# EAGLE board haccess (EAGLE 9.6.2)
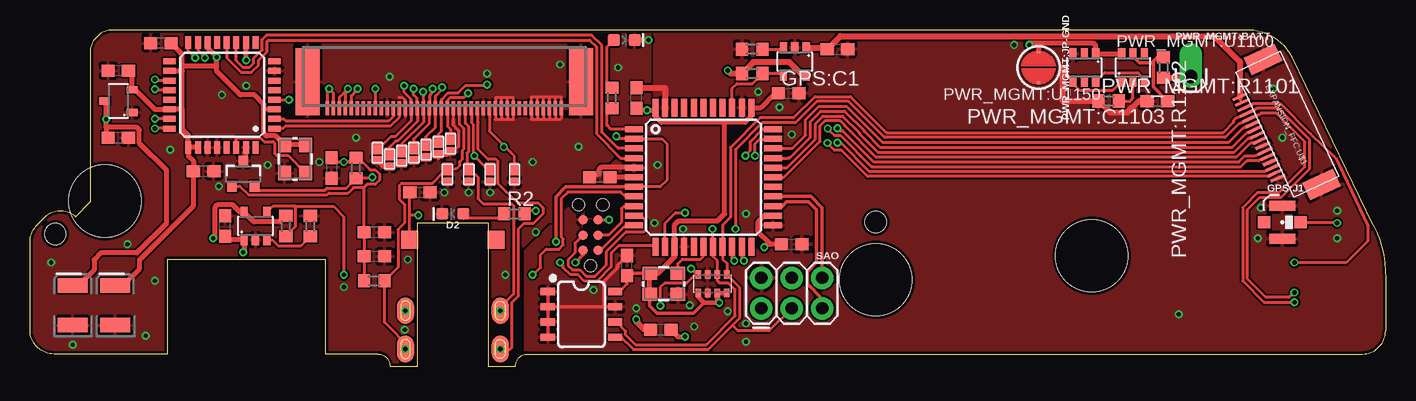
[diagram p0: board, top side]
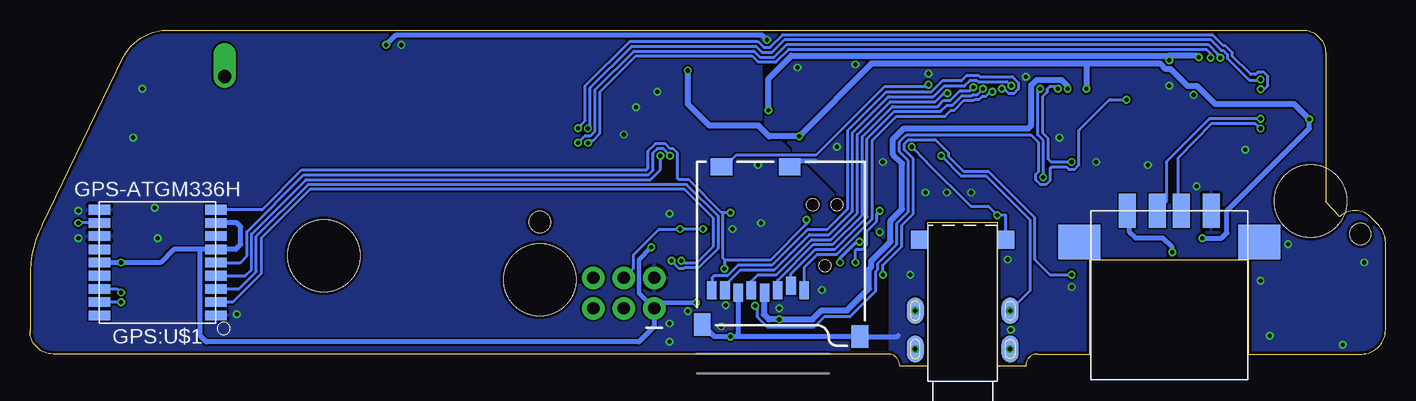
[diagram p1: board, bottom side, seen from below]

Size 113 x 28.02 mm. Coordinates in mm from the lower left corner, seen from the top.
Outline: 29,1.02 24.63,1.02 24.63,8.89 11.43,8.89 11.43,1.02 2,1.02 arc-90 0,3.02 0,10.31 arc-45 0.61,11.79 1.27,12.45 arc-90 3.81,12.45 5,13.72 5,26.1 arc-90 6.92,28.02 101.64,28.02 arc-60 105.23,25.76 111.98,11.76 arc-30 113,7.31 113,2.94 arc-90 111.08,1.02 41.48,1.02 arc90 40.48,0.02 38.19,0 38.19,11.94 32.29,11.94 32.29,0.02 30,0.02 arc90 29,1.02
Copper layers (1*16): Top 0.035mm / dielectric 1.5mm / Bottom 0.035mm
Design rules "dirtypcbs": minimum track width 6mil, minimum drill 12mil, track to track 6mil, track to pad 6mil, pad to pad 6mil, via to via 6mil, smd to smd 0mil, copper to edge 10mil, drill to drill 10mil, minimum pad ring 10mil, minimum via ring 6mil, stop-mask expansion 2mil, vias tented up to drill 25mil, thermal gap 10mil
Net classes: 1 pwr: width 0.305 mm
Holes 1.75 mm at 2.1,11.02 70.5,12.02
Holes 6 mm at 6.25,13.77 70.51,7.22 88.51,9.22
bKeepout: area -1,15.5 to 116,29

## Footprints (pad centres in the part's own frame; a part is rotated, then mirrored left to right if it is on the bottom)
LED-0603 = smd 1 x 1: A -0.877,0; C 0.877,0
C0603 = smd 1.1 x 1: 1 -0.85,0; 2 0.85,0
SO08 = smd 0.6 x 1.2: 1 -1.905,-2.8; 2 -0.635,-2.8; 3 0.635,-2.8; 4 1.905,-2.8; 5 1.905,2.8; 6 0.635,2.8; 7 -0.635,2.8; 8 -1.905,2.8
R0603 = smd 1 x 1.1: 1 -0.85,0; 2 0.85,0
FPC-C528044 = smd 0.25 x 1.3: P$1 -3.75,0.65; P$2 -3.25,0.65; P$3 -2.75,0.65; P$4 -2.25,0.65; P$5 -1.75,0.65; P$6 -1.25,0.65; P$7 -0.75,0.65; P$8 -0.25,0.65; P$9 0.25,0.65; P$10 0.75,0.65; P$11 1.25,0.65; P$12 1.75,0.65; P$13 2.25,0.65; P$14 2.75,0.65; P$15 3.25,0.65; P$16 3.75,0.65 | smd 1.6 x 2.8: SHIELD1 -5.75,-2.43; SHIELD2 5.75,-2.43
SOT23-5 = smd 0.6 x 0.9: 1 -0.95,-1.15; 2 0,-1.15; 3 0.95,-1.15; 4 0.95,1.15; 5 -0.95,1.15
U.FL = smd 2.2 x 0.85: 1 0,1.375; 2 0,-1.375 | smd 1.05 x 1: FEED 1.525,0; NC -1.525,0
ATGM336H = smd 1.8 x 0.8: P$1 -4.85,4.4; P$2 -4.85,3.3; P$3 -4.85,2.2; P$4 -4.85,1.1; P$5 -4.85,0; P$6 -4.85,-1.1; P$7 -4.85,-2.2; P$8 -4.85,-3.3; P$9 -4.85,-4.4; P$10 4.85,-4.4; P$11 4.85,-3.3; P$12 4.85,-2.2; P$13 4.85,-1.1; P$14 4.85,0; P$15 4.85,1.1; P$16 4.85,2.2; P$17 4.85,3.3; P$18 4.85,4.4
SOT23-3 = smd 0.8 x 0.9: 1 -0.95,-1; 2 0.95,-1; 3 0,1.1
DFN1608 = smd 0.65 x 0.8: P$1 0.625,0 | smd 1.05 x 0.8: P$2 -0.425,0
AUDIO_JACK_C128994 = smd 2.2 x 1.4 bottom: B1 -2.7,3.95; B2 -5.9,3.95; B4 -2.7,-3.95; B6 -5.9,-3.95 | smd 1.5 x 1.4 bottom: B3 -11.8,3.6; B5 -11.8,-3.6 | smd 2.2 x 1.4: T1 -2.7,3.95; T2 -5.9,3.95; T4 -2.7,-3.95; T6 -5.9,-3.95 | smd 1.5 x 1.4: T3 -11.8,3.6; T5 -11.8,-3.6
MICRO-SD-SOCKET-SDIO = smd 1.8 x 1.4: CD1 11.92,0.4; CD2 6.22,0.4 | smd 0.8 x 1.5: CD/DAT3 6.13,10.3; CLK 9.43,10.7; CMD 7.23,10.7; DAT0 11.63,10.7; DAT1 12.73,10.7; DAT2 5.03,10.7; GND 10.53,10.9; VCC 8.33,10.9 | smd 1.4 x 1.9: GND1 0.37,14.55; GND3 13.52,13.55
TC2030-IDC-NL = smd 0.787 x 0.787: 1 -1.27,-0.635; 2 -1.27,0.635; 3 0,-0.635; 4 0,0.635; 5 1.27,-0.635; 6 1.27,0.635 | hole 0.991: -2.54,0; 2.54,1.016; 2.54,-1.016
EXBV8V = smd 0.45 x 0.7: 1 -1.2,-0.775; 2 -0.4,-0.775; 3 0.4,-0.775; 4 1.2,-0.775; 5 1.2,0.775; 6 0.4,0.775; 7 -0.4,0.775; 8 -1.2,0.775
TQFP44 = smd 1.5 x 0.5: 1 -5.8,4; 2 -5.8,3.2; 3 -5.8,2.4; 4 -5.8,1.6; 5 -5.8,0.8; 6 -5.8,0; 7 -5.8,-0.8; 8 -5.8,-1.6; 9 -5.8,-2.4; 10 -5.8,-3.2; 11 -5.8,-4; 23 5.8,-4; 24 5.8,-3.2; 25 5.8,-2.4; 26 5.8,-1.6; 27 5.8,-0.8; 28 5.8,0; 29 5.8,0.8; 30 5.8,1.6; 31 5.8,2.4; 32 5.8,3.2; 33 5.8,4 | smd 0.5 x 1.5: 12 -4,-5.8; 13 -3.2,-5.8; 14 -2.4,-5.8; 15 -1.6,-5.8; 16 -0.8,-5.8; 17 0,-5.8; 18 0.8,-5.8; 19 1.6,-5.8; 20 2.4,-5.8; 21 3.2,-5.8; 22 4,-5.8; 34 4,5.8; 35 3.2,5.8; 36 2.4,5.8; 37 1.6,5.8; 38 0.8,5.8; 39 0,5.8; 40 -0.8,5.8; 41 -1.6,5.8; 42 -2.4,5.8; 43 -3.2,5.8; 44 -4,5.8
CRYSTAL-SMD-3.2X2.5MM = smd 1.2 x 1.1: 1 -1.175,-0.875; 2 1.175,-0.875; 3 1.175,0.875; 4 -1.175,0.875
FPC05040-17204 = smd 0.3 x 1.2: P$1 -9.75,0.6; P$2 -9.25,0.6; P$3 -8.75,0.6; P$4 -8.25,0.6; P$5 -7.75,0.6; P$6 -7.25,0.6; P$7 -6.75,0.6; P$8 -6.25,0.6; P$9 -5.75,0.6; P$10 -5.25,0.6; P$11 -4.75,0.6; P$12 -4.25,0.6; P$13 -3.75,0.6; P$14 -3.25,0.6; P$15 -2.75,0.6; P$16 -2.25,0.6; P$17 -1.75,0.6; P$18 -1.25,0.6; P$19 -0.75,0.6; P$20 -0.25,0.6; P$21 0.25,0.6; P$22 0.75,0.6; P$23 1.25,0.6; P$24 1.75,0.6; P$25 2.25,0.6; P$26 2.75,0.6; P$27 3.25,0.6; P$28 3.75,0.6; P$29 4.25,0.6; P$30 4.75,0.6; P$31 5.25,0.6; P$32 5.75,0.6; P$33 6.25,0.6; P$34 6.75,0.6; P$35 7.25,0.6; P$36 7.75,0.6; P$37 8.25,0.6; P$38 8.75,0.6; P$39 9.25,0.6; P$40 9.75,0.6 | smd 2 x 5.6: P$41 -11.4,-1.6; P$42 11.4,-1.6
1X01_OFFSET = drill 1.118 pad 1.88 offset: 1 0,0
EIA3528 = smd 1.2 x 2.5: A 1.65,0; C -1.65,0
SMT-JUMPER_2_NO_SILK_ROUND = smd 0.152 x 0.305: 1 -1.27,0; 2 1.27,0
SOT23-6 = smd 0.6 x 0.9: 1 -0.95,-1.15; 2 0,-1.15; 3 0.95,-1.15; 4 0.95,1.15; 5 0,1.15; 6 -0.95,1.15
SOT23-3' = smd 0.6 x 0.9: 1 -0.95,-1.15; 2 0.95,-1.15; 3 0,1.15
2X3 = drill 1.016 pad 1.88: 1 0,0; 2 0,2.54; 3 2.54,0; 4 2.54,2.54; 5 5.08,0; 6 5.08,2.54
USB_SOCKET_A_C42620 = smd 1.4 x 2.8: D+ -1,0; D- 1,0; GND -3.5,0; VCC 3.5,0 | smd 3.5 x 2.9: SHEILD1 -7.5,2.6; SHEILD2 7.5,2.6
VF_S-PQFP-G32 = smd 1.05 x 0.5: 1 -4.375,2.8; 2 -4.375,2; 3 -4.375,1.2; 4 -4.375,0.4; 5 -4.375,-0.4; 6 -4.375,-1.2; 7 -4.375,-2; 8 -4.375,-2.8; 17 4.375,-2.8; 18 4.375,-2; 19 4.375,-1.2; 20 4.375,-0.4; 21 4.375,0.4; 22 4.375,1.2; 23 4.375,2; 24 4.375,2.8 | smd 0.5 x 1.05: 9 -2.8,-4.375; 10 -2,-4.375; 11 -1.2,-4.375; 12 -0.4,-4.375; 13 0.4,-4.375; 14 1.2,-4.375; 15 2,-4.375; 16 2.8,-4.375; 25 2.8,4.375; 26 2,4.375; 27 1.2,4.375; 28 0.4,4.375; 29 -0.4,4.375; 30 -1.2,4.375; 31 -2,4.375; 32 -2.8,4.375

## Placement (x,y rotation side)
D1  [LED-0603]  49.53,27.18 0 top
D2  [LED-0603]  35.25,12.7 180 top
EEPROM:C1  0.1uF  [C0603]  49.78,8.38 90 top
EEPROM:EEPROM  24LC256  [SO08]  45.97,4.32 270 top
EXPANSION_FFC:C1  0.1uF  [C0603]  67.31,26.42 0 top
EXPANSION_FFC:R1  10k  [R0603]  60.2,26.42 180 top
EXPANSION_FFC:R2  10k  [R0603]  60.2,24.38 0 top
EXPANSION_FFC:U$1  PINEBOOK-PRO-EXPANSION-CONNECTOR  [FPC-C528044]  103.03,19.33 115 top
EXPANSION_FFC:U$2  CURRENT-LIMITINGSY6280  [SOT23-5]  63.75,25.4 180 top
GPS:C1  0.1uF  [C0603]  63.25,22.73 0 top
GPS:J1  U.FL  [U.FL]  104.39,11.99 0 top
GPS:U$1  GPS-ATGM336H  [ATGM336H]  102.36,8.64 180 bottom
HALL_EFFECT:C1  0.1uF  [C0603]  25.15,16.51 270 top
HALL_EFFECT:R1  10k  [R0603]  27.18,16.51 90 top
HALL_EFFECT:U$1  HALL_EFFECT_SENSORTH9245  [SOT23-3]  17.78,16 0 top
HEADPHONE:C1  0.1uF  [C0603]  32.51,14.48 0 top
HEADPHONE:C2  1uF  [C0603]  28.7,9.14 0 top
HEADPHONE:C3  0.1uF  [C0603]  28.7,11.18 0 top
HEADPHONE:ESD1  DIODE_ESDUAD03C05L01  [DFN1608]  40.39,16 270 top
HEADPHONE:ESD2  DIODE_ESDUAD03C05L01  [DFN1608]  38.35,16 270 top
HEADPHONE:ESD3  DIODE_ESDUAD03C05L01  [DFN1608]  36.58,16 270 top
HEADPHONE:ESD4  DIODE_ESDUAD03C05L01  [DFN1608]  34.8,16 270 top
HEADPHONE:HEADPHONES  C128994  [AUDIO_JACK_C128994]  35.25,-1.27 270 bottom
HEADPHONE:R1  12.2k  [R0603]  28.7,7.11 180 top
MICROSD:C1  0.1uF  [C0603]  52.58,3.05 0 top
MICROSD:ESD1  DIODE_ESDUAD03C05L01  [DFN1608]  34.04,18.29 270 top
MICROSD:ESD2  DIODE_ESDUAD03C05L01  [DFN1608]  29.97,17.27 270 top
MICROSD:ESD3  DIODE_ESDUAD03C05L01  [DFN1608]  28.96,17.78 270 top
MICROSD:ESD4  DIODE_ESDUAD03C05L01  [DFN1608]  35.05,18.54 270 top
MICROSD:ESD5  DIODE_ESDUAD03C05L01  [DFN1608]  33.02,18.03 270 top
MICROSD:ESD6  DIODE_ESDUAD03C05L01  [DFN1608]  32,17.78 270 top
MICROSD:ESD7  DIODE_ESDUAD03C05L01  [DFN1608]  30.99,17.53 270 top
MICROSD:JP1  USD-SDIO-SOCKET  [MICRO-SD-SOCKET-SDIO]  43.43,17.02 180 bottom
MPU:C3  1uF  [C0603]  47.5,15.75 180 top
MPU:C4  0.1uF  [C0603]  50.55,22.35 90 top
MPU:C6  0.1uF  [C0603]  63.5,10.16 0 top
MPU:PROGRAM  AVR_PROGRAMMER  [TC2030-IDC-NL]  46.74,10.92 90 top
MPU:RN2  10k  [EXBV8V]  56.9,6.86 180 top
MPU:U2  32U4  [TQFP44]  56.13,15.75 0 top
MPU:U$2  OSCILLATOR16MHZ_SHENZEN_SCTF_C87369  [CRYSTAL-SMD-3.2X2.5MM]  52.83,6.86 0 top
PBP_FFC:J2  [FPC05040-17204]  34.54,22.1 180 top
PWR_MGMT:BATT  [1X01_OFFSET]  96.77,24.13 0 top
PWR_MGMT:C1  0.1uF  [C0603]  7.37,19.05 0 top
PWR_MGMT:C8  0.1uF  [C0603]  7.37,24.64 180 top
PWR_MGMT:C10  47uF  [EIA3528]  3.56,5.08 90 top
PWR_MGMT:C11  47uF  [EIA3528]  7.11,5.08 90 top
PWR_MGMT:C1103  0.1uF  [C0603]  93.98,22.1 180 top
PWR_MGMT:JP-GND  JUMPER-SMT_2_NO_SILK_ROUND  [SMT-JUMPER_2_NO_SILK_ROUND]  84.07,24.89 270 top
PWR_MGMT:R1101  1k  [R0603]  89.92,22.1 0 top
PWR_MGMT:R1102  100  [R0603]  94.49,24.89 270 top
PWR_MGMT:U1100  FS312F-G  [SOT23-6]  91.95,24.89 0 top
PWR_MGMT:U1150  FS8205  [SOT23-6]  87.88,24.89 180 top
PWR_MGMT:U$3  REGULATOR  [SOT23-3']  7.37,22.1 90 top
R1  160  [R0603]  48.51,22.35 270 top
R2  160  [R0603]  40.39,12.7 0 top
SAO  FEMALE 2x3  [2X3]  60.96,4.83 0 top
USB_A:C1  0.1uF  [C0603]  16.26,11.68 90 top
USB_A:R1  10k  [R0603]  23.37,11.68 90 top
USB_A:R2  10k  [R0603]  21.34,11.68 270 top
USB_A:U$1  CURRENT-LIMITINGSY6280  [SOT23-5]  18.8,11.68 0 top
USB_A:USB  USB_RECESSED_C42620  [USB_SOCKET_A_C42620]  18.03,12.95 180 bottom
USB_HUB:C1  0.1uF  [C0603]  14.48,16.26 0 top
USB_HUB:C2  0.1uF  [C0603]  10.92,26.92 180 top
USB_HUB:IC1  TUSB2046BVFR  [VF_S-PQFP-G32]  16,22.61 180 top
USB_HUB:U$1  OSCILLATOR6MHZ_SHENZEN_SCTF_C387198  [CRYSTAL-SMD-3.2X2.5MM]  22.1,17.27 270 top

## Library data of the parts
D1 D2 = SparkFun-LED
EEPROM:C1 EXPANSION_FFC:C1 GPS:C1 HALL_EFFECT:C1 HEADPHONE:C1-HEADPHONE:C3 MICROSD:C1 MPU:C3 MPU:C4 MPU:C6 PWR_MGMT:C1 PWR_MGMT:C8 PWR_MGMT:C1103 USB_A:C1 USB_HUB:C1 USB_HUB:C2 = rcl; SPICEPREFIX: C
EEPROM:EEPROM = SparkFun-IC-Memory; PROD_ID: IC-09714
EXPANSION_FFC:R1 EXPANSION_FFC:R2 HALL_EFFECT:R1 HEADPHONE:R1 PWR_MGMT:R1101 PWR_MGMT:R1102 R1 R2 USB_A:R1 USB_A:R2 = rcl; SPICEPREFIX: R
EXPANSION_FFC:U$1 EXPANSION_FFC:U$2 GPS:U$1 HALL_EFFECT:U$1 HEADPHONE:ESD1-HEADPHONE:ESD4 HEADPHONE:HEADPHONES MICROSD:ESD1-MICROSD:ESD7 PBP_FFC:J2 USB_A:U$1 USB_A:USB = pinebook_parts
GPS:J1 = SparkFun-Connectors; PROD_ID: CONN-09193; SF_ID: WRL-09144
MICROSD:JP1 = SparkFun-Retired; PROD_ID: CONN-07820
MPU:PROGRAM MPU:RN2 MPU:U$2 PWR_MGMT:U$3 USB_HUB:U$1 = gone
MPU:U2 = SparkFun-IC-Microcontroller; PROD_ID: IC-11161
PWR_MGMT:BATT = SparkFun-Connectors
PWR_MGMT:C10 PWR_MGMT:C11 = SparkFun-Capacitors; PROD_ID: CAP-08310
PWR_MGMT:JP-GND = SparkFun-Jumpers
PWR_MGMT:U1100 PWR_MGMT:U1150 = geusebio
SAO = SparkFun-Connectors; PROD_ID: CONN-11566
USB_HUB:IC1 = texas; MF: TEXAS INSTRUMENTS; MPN: TUSB2046BVFR; OC_FARNELL: 1470507; OC_NEWARK: 77C1806

## Nets
1V8_CODEC: PBP_FFC:J2.P$35
3.3V: EEPROM:C1.1 EEPROM:EEPROM.8 EXPANSION_FFC:U$1.P$14 GPS:C1.1 GPS:U$1.P$6 GPS:U$1.P$8 GPS:U$1.P$14 MPU:C4.1 MPU:C6.1 MPU:RN2.5 MPU:RN2.7 MPU:RN2.8 MPU:U2.14 MPU:U2.24 MPU:U2.34 MPU:U2.44 MPU:U$2.1 MPU:U$2.4 PWR_MGMT:C8.1 PWR_MGMT:C11.A PWR_MGMT:U$3.2 SAO.1 USB_HUB:C1.1 USB_HUB:C2.1 USB_HUB:IC1.3 USB_HUB:IC1.10 USB_HUB:IC1.14 USB_HUB:IC1.18 USB_HUB:IC1.22 USB_HUB:IC1.25 USB_HUB:IC1.26 USB_HUB:U$1.1 USB_HUB:U$1.4
3V0_CODEC: HALL_EFFECT:C1.1 HALL_EFFECT:R1.2 HALL_EFFECT:U$1.1 HEADPHONE:C2.1 HEADPHONE:C3.1 HEADPHONE:R1.2 PBP_FFC:J2.P$36
3V0_SD: MICROSD:C1.1 MICROSD:JP1.VCC PBP_FFC:J2.P$37 PBP_FFC:J2.P$38
5V: EXPANSION_FFC:R2.1 EXPANSION_FFC:U$2.5 MPU:PROGRAM.2 MPU:U2.2 MPU:U2.7 PBP_FFC:J2.P$39 PBP_FFC:J2.P$40 PWR_MGMT:C1.1 PWR_MGMT:C10.A PWR_MGMT:U$3.3 USB_A:R2.1 USB_A:U$1.5
/RST: GPS:U$1.P$9 MPU:PROGRAM.5 MPU:RN2.4 MPU:U2.13 USB_HUB:IC1.4
AUD_STATUS: MPU:U2.12 R2.2
DM0: PBP_FFC:J2.P$29 USB_HUB:IC1.2
DM1: MPU:U2.3 USB_HUB:IC1.11
DM2: EXPANSION_FFC:U$1.P$2 USB_HUB:IC1.15
DM3: EXPANSION_FFC:U$1.P$5 USB_HUB:IC1.19
DM4: USB_A:USB.D- USB_HUB:IC1.23
DP0: PBP_FFC:J2.P$28 USB_HUB:IC1.1
DP1: MPU:U2.4 USB_HUB:IC1.12
DP2: EXPANSION_FFC:U$1.P$3 USB_HUB:IC1.16
DP3: EXPANSION_FFC:U$1.P$6 USB_HUB:IC1.20
DP4: USB_A:USB.D+ USB_HUB:IC1.24
EXP_EN: EXPANSION_FFC:R2.2 EXPANSION_FFC:U$2.4 MPU:U2.36
EXPANSION_FFC:ISET: EXPANSION_FFC:R1.1 EXPANSION_FFC:U$2.3
EXPANSION_FFC:VOUT: EXPANSION_FFC:C1.1 EXPANSION_FFC:U$1.P$15 EXPANSION_FFC:U$1.P$16 EXPANSION_FFC:U$2.1
G0: EXPANSION_FFC:U$1.P$11 MPU:U2.31
G1: EXPANSION_FFC:U$1.P$10 MPU:U2.30
G2: EXPANSION_FFC:U$1.P$9 MPU:U2.29
G3: EXPANSION_FFC:U$1.P$8 MPU:U2.28
GND: D1.C D2.C HALL_EFFECT:C1.2 HALL_EFFECT:U$1.3 HEADPHONE:C1.2 HEADPHONE:C2.2 HEADPHONE:C3.2 HEADPHONE:ESD1.P$1 HEADPHONE:ESD2.P$1 HEADPHONE:ESD3.P$1 HEADPHONE:ESD4.P$1 MICROSD:C1.2 MICROSD:ESD1.P$1 MICROSD:ESD2.P$1 MICROSD:ESD3.P$1 MICROSD:ESD4.P$1 MICROSD:ESD5.P$1 MICROSD:ESD6.P$1 MICROSD:ESD7.P$1 MICROSD:JP1.CD2 MICROSD:JP1.GND MICROSD:JP1.GND1 MICROSD:JP1.GND3 PBP_FFC:J2.P$1 PBP_FFC:J2.P$2 PBP_FFC:J2.P$3 PBP_FFC:J2.P$4 PBP_FFC:J2.P$5 PBP_FFC:J2.P$6 PBP_FFC:J2.P$9 PBP_FFC:J2.P$10 PBP_FFC:J2.P$11 PBP_FFC:J2.P$12 PBP_FFC:J2.P$14 PBP_FFC:J2.P$19 PBP_FFC:J2.P$27 PBP_FFC:J2.P$30 PBP_FFC:J2.P$41 PBP_FFC:J2.P$42 PWR_MGMT:C1.2 PWR_MGMT:C8.2 PWR_MGMT:C10.C PWR_MGMT:C11.C PWR_MGMT:JP-GND.1 PWR_MGMT:U1100.6 PWR_MGMT:U1150.1 PWR_MGMT:U$3.1 USB_A:C1.2 USB_A:R1.2 USB_A:U$1.2 USB_A:USB.GND USB_HUB:C1.2 USB_HUB:C2.2 USB_HUB:IC1.7 USB_HUB:IC1.27 USB_HUB:IC1.28 USB_HUB:IC1.31 USB_HUB:U$1.2
GND_ISOLATED: EEPROM:C1.2 EEPROM:EEPROM.1 EEPROM:EEPROM.2 EEPROM:EEPROM.3 EEPROM:EEPROM.4 EEPROM:EEPROM.7 EXPANSION_FFC:C1.2 EXPANSION_FFC:R1.2 EXPANSION_FFC:U$1.P$1 EXPANSION_FFC:U$1.P$4 EXPANSION_FFC:U$1.P$7 EXPANSION_FFC:U$1.SHIELD1 EXPANSION_FFC:U$1.SHIELD2 EXPANSION_FFC:U$2.2 GPS:C1.2 GPS:J1.1 GPS:J1.2 GPS:U$1.P$1 GPS:U$1.P$10 GPS:U$1.P$12 MPU:C3.2 MPU:C4.2 MPU:C6.2 MPU:PROGRAM.6 MPU:RN2.3 MPU:RN2.6 MPU:U2.5 MPU:U2.15 MPU:U2.23 MPU:U2.35 MPU:U2.43 MPU:U$2.2 PWR_MGMT:C1103.2 PWR_MGMT:JP-GND.2 PWR_MGMT:R1101.1 PWR_MGMT:U1150.3 SAO.2
GPS:RF_IN: GPS:J1.FEED GPS:U$1.P$11
GPS_ENABLE: GPS:U$1.P$5 MPU:U2.33
HALL_SENSE: HALL_EFFECT:R1.1 HALL_EFFECT:U$1.2 PBP_FFC:J2.P$32
HP_DET_H: HEADPHONE:C1.1 HEADPHONE:ESD1.P$2 HEADPHONE:HEADPHONES.B3 HEADPHONE:HEADPHONES.T3 PBP_FFC:J2.P$13
HP_GND: HEADPHONE:HEADPHONES.B4 HEADPHONE:HEADPHONES.T4 PBP_FFC:J2.P$15
HPO_L: HEADPHONE:ESD2.P$2 HEADPHONE:HEADPHONES.B2 HEADPHONE:HEADPHONES.T2 PBP_FFC:J2.P$16
HPO_R: HEADPHONE:ESD3.P$2 HEADPHONE:HEADPHONES.B6 HEADPHONE:HEADPHONES.T6 PBP_FFC:J2.P$17
MIC_IN2P: HEADPHONE:ESD4.P$2 HEADPHONE:HEADPHONES.B1 HEADPHONE:HEADPHONES.T1 HEADPHONE:R1.1 PBP_FFC:J2.P$18
MPU:32U4_OSC: MPU:U2.17 MPU:U$2.3
MPU:PB1/SCK: MPU:PROGRAM.3 MPU:U2.9
MPU:PB2/MOSI: MPU:PROGRAM.4 MPU:U2.10
MPU:PB3/MISO: MPU:PROGRAM.1 MPU:U2.11
MPU:PD5: MPU:U2.22
MPU:PD7: MPU:U2.27
MPU:PF0: MPU:U2.41
MPU:PF1: MPU:U2.40
MPU:PF4: MPU:U2.39
MPU:PF5: MPU:U2.38
MPU:PF6: MPU:U2.37
MPU:UCAP: MPU:C3.1 MPU:U2.6
MPU_RX: GPS:U$1.P$2 MPU:U2.20
MPU_TX: GPS:U$1.P$3 MPU:U2.21
N$1: D1.A R1.1
N$2: D2.A R2.1
PBP_FFC:PMIC_PWRON: PBP_FFC:J2.P$31
PULSE: GPS:U$1.P$4 MPU:U2.32
PWR_MGMT:FS_CS: PWR_MGMT:R1101.2 PWR_MGMT:U1100.2
PWR_MGMT:FS_V_BATT: PWR_MGMT:C1103.1 PWR_MGMT:R1102.1 PWR_MGMT:U1100.5
PWR_MGMT:OC: PWR_MGMT:U1100.3 PWR_MGMT:U1150.6
PWR_MGMT:OD: PWR_MGMT:U1100.1 PWR_MGMT:U1150.4
SAO1: MPU:U2.25 SAO.5
SAO2: MPU:U2.26 SAO.6
SCL: EEPROM:EEPROM.6 EXPANSION_FFC:U$1.P$12 GPS:U$1.P$17 MPU:RN2.2 MPU:U2.18 SAO.4
SD_CLK: MICROSD:ESD4.P$2 MICROSD:JP1.CLK PBP_FFC:J2.P$20
SD_CMD: MICROSD:ESD5.P$2 MICROSD:JP1.CMD PBP_FFC:J2.P$22
SD_D0: MICROSD:ESD3.P$2 MICROSD:JP1.DAT0 PBP_FFC:J2.P$26
SD_D1: MICROSD:ESD2.P$2 MICROSD:JP1.DAT1 PBP_FFC:J2.P$25
SD_D2: MICROSD:ESD7.P$2 MICROSD:JP1.DAT2 PBP_FFC:J2.P$24
SD_D3: MICROSD:ESD6.P$2 MICROSD:JP1.CD/DAT3 PBP_FFC:J2.P$23
SD_DET_L: MICROSD:ESD1.P$2 MICROSD:JP1.CD1 PBP_FFC:J2.P$21
SDA: EEPROM:EEPROM.5 EXPANSION_FFC:U$1.P$13 GPS:U$1.P$16 MPU:RN2.1 MPU:U2.19 SAO.3
STATUS: MPU:U2.1 R1.2
USB_A:ISET: USB_A:R1.1 USB_A:U$1.3
USB_A:VOUT: USB_A:C1.1 USB_A:U$1.1 USB_A:USB.VCC
USB_EN: MPU:U2.8 USB_A:R2.2 USB_A:U$1.4
USB_HUB:N$1: USB_HUB:IC1.30 USB_HUB:U$1.3
V_BATT: PWR_MGMT:BATT.1 PWR_MGMT:R1102.2

## Tracks (layer width: path | path; a pad name or v marks a point on that pad's centre or on a via)
3.3V  (via drill 0.35)
  Top 0.254: EEPROM:EEPROM.8 49.15,6.22 49.78,6.86 EEPROM:C1.1 49.98,7.73 | EXPANSION_FFC:U$1.P$14 102.03,21.9 104.22,21.9 106.75,19.37 108.69,17.5 108.86,17.32 109.15,16.73 111.51,11.68 111.51,10.41 109.73,8.64 v105.41,8.64
  Top 0.305: 49.98,7.73 MPU:U$2.4 | MPU:U$2.1 51.66,5.05 52.29,4.42 55.33,4.42 56.19,5.28
  Top 0.356: MPU:RN2.7 MPU:RN2.8 | MPU:RN2.5 55.7,5.77 56.19,5.28 v57.46,5.28 57.3,5.44
  Top 0.406: USB_HUB:U$1.4 USB_HUB:U$1.1 20.47,19.2 19.7,19.2 19.5,19.41 19.5,21.41 | USB_HUB:IC1.26 USB_HUB:IC1.25 | USB_HUB:IC1.25 13.2,19.25 12.69,19.76 12.69,21.41 | 12.69,21.41 USB_HUB:IC1.22 10.41,21.41 8.77,23.05 PWR_MGMT:U$3.2 8.52,24.34 PWR_MGMT:C8.1 | USB_HUB:IC1.18 12.69,24.61 | 12.69,21.41 12.69,24.61 | MPU:U$2.1 MPU:U$2.4 52.35,7.73 53.73,9.11 MPU:U2.14 53.73,11.77 54.07,12.11 57.33,12.11 57.91,12.7 57.91,20.32 | 12.69,25.02 12.69,26 USB_HUB:C2.1 | v18.03,25.49 18,25.53 USB_HUB:IC1.10 | USB_HUB:IC1.3 19.5,21.41 | 19.5,21.41 19.5,21.82 18.71,22.61 17.53,22.61 15.56,24.57 15.56,25.02 | USB_HUB:IC1.25 13.2,17.53 13.63,17.11 USB_HUB:C1.1 13.63,13.37 9.14,8.89 9.14,8.13 7.75,6.73 PWR_MGMT:C11.A | 57.91,20.32 52.66,20.32 52.13,20.84 MPU:U2.44 52.13,21.34 v51.44,21.34 50.55,21.34 MPU:C4.1 | USB_HUB:IC1.14 14.8,26.5 15.21,26.1 v15.56,25.75 15.56,25.02 | 12.69,24.61 12.69,25.02 | 12.69,25.02 15.56,25.02 | GPS:C1.1 61.98,22.61 60.92,21.55 MPU:U2.34 60.13,20.84 59.61,20.32 57.91,20.32 | 57.3,5.44 MPU:RN2.7 | MPU:U2.24 61.23,12.55 60.71,12.02 60.71,11.18 61.59,10.29 | MPU:C6.1 61.72,10.16 61.59,10.29 | v61.21,9.91 61.59,10.29
  Bottom 0.356: v57.46,5.28 60.51,5.28 SAO.1 62.23,6.1 62.23,8.89 v61.21,9.91
  Bottom 0.406: 98.81,9.74 GPS:U$1.P$6 95.85,9.74 95.43,10.16 95.43,11.61 95.76,11.94 GPS:U$1.P$8 | 98.81,9.74 101.01,9.74 102.11,8.64 v105.41,8.64 GPS:U$1.P$14 | SAO.1 60.96,3.3 62.23,2.03 98.3,2.03 98.81,2.54 98.81,9.74
  Bottom 0.508: v15.56,25.75 15.59,25.75 15.72,25.88 18.03,25.88 | v18.03,25.49 18.03,25.88 | v51.44,21.34 51.44,23.97 49.52,25.88 18.03,25.88
3V0_CODEC  (via drill 0.35)
  Top 0.254: HALL_EFFECT:C1.1 25.49,17.02 v26.16,17.02 | HALL_EFFECT:R1.2 26.84,17.02 v26.16,17.02 | HALL_EFFECT:U$1.1 17.48,15 18.21,14.27 24.75,14.27 24.91,14.42 26.52,14.42 26.97,14.88 27.84,14.88 | v26.16,17.02 27.69,17.02 28.35,16.36 28.79,16.36 29.15,16 29.15,15.5 28.79,15.14 28.1,15.14 27.84,14.88 | 27.84,14.88 27.85,14.88 HEADPHONE:C3.1 HEADPHONE:C2.1 HEADPHONE:R1.2 | PBP_FFC:J2.P$36 26.79,22.55 27.1,22.86 27.1,22.91 v27.3,23.11
  Bottom 0.254: v27.3,23.11 27.5,23.31 27.99,23.31 28.19,23.11 28.19,22.86 28.59,22.46 28.59,19.45 28.13,18.99 28.13,17.27 27.88,17.02 v26.16,17.02
3V0_SD  (via drill 0.35)
  Top 0.254: PBP_FFC:J2.P$38 25.79,22.41 v26.5,23.11 26.29,22.91 PBP_FFC:J2.P$37
  Top 0.508: v50.55,3.9 50.55,3.72 51.22,3.05 MICROSD:C1.1
  Bottom 0.508: MICROSD:JP1.VCC 51.82,6.07 51.82,4.32 51.4,3.9 v50.55,3.9 47.75,3.9 47.01,4.64 44.88,4.64 43.05,6.47 43.05,8.09 42.87,8.27 42.87,8.78 41.27,10.38 41.27,12.13 40.31,13.09 40.31,16.89 41.05,17.63 41.05,18.91 40.14,19.82 29.77,19.82 29.53,20.07 29.53,23.42 29.1,23.85 27,23.85 26.5,23.34 v26.5,23.11
5V  (via drill 0.35)
  Top 0.254: PBP_FFC:J2.P$40 24.79,22.98 v24.93,23.11 25.29,22.75 PBP_FFC:J2.P$39 | MPU:U2.7 52.54,14.95 53.09,15.49 53.09,18.54 52.68,18.95 MPU:U2.2 49.08,18.95 v48.87,19.16 | MPU:PROGRAM.2 45.99,9.65 45.99,9.54
  Top 0.305: v45.47,8.64 46.1,9.27 46.1,9.44 45.99,9.54 | v43.84,10.37 43.84,14.12 44.66,14.94 MPU:U2.7
  Top 0.406: PWR_MGMT:C10.A 4.06,6.73 5.33,8 5.33,8.89 5.89,9.45 8.91,9.45 11.38,11.91 11.38,16.33 9.12,18.59 9.12,19.7 8.91,19.91 6.35,19.91 | 6.35,19.91 v6.35,20.57 6.35,22.1 PWR_MGMT:U$3.3 | 6.35,19.91 6.35,19.05 PWR_MGMT:C1.1 | USB_A:R2.1 20.83,12.03 18.65,12.03 USB_A:U$1.5 17.51,12.83 16.9,13.44 15.61,13.44 15.4,13.23 15.4,10.79 v15.28,10.67
  Top 0.508: EXPANSION_FFC:U$2.5 64.38,24.25 63.29,25.34 60.3,25.34 EXPANSION_FFC:R2.1 58.42,24.38 v58.17,24.64
  Bottom 0.305: v45.47,8.64 45.47,8.99 44.09,10.37 v43.84,10.37
  Bottom 0.406: v15.28,10.67 13.67,10.67 13.22,11.11 13.22,12.94 6.35,19.81 v6.35,20.57
  Bottom 0.508: v6.35,20.57 7.62,21.84 14.2,21.84 15.7,23.34 16.48,23.34 17.9,24.76 18.34,24.76 18.77,25.19 18.8,25.22 24.93,25.22 | 24.93,25.22 v24.93,23.11 | 24.93,25.22 42.86,25.22 v48.87,19.16 51.39,19.16 52.27,20.04 56.36,20.04 58.17,21.84 v58.17,24.64
/RST  (via drill 0.35)
  Top 0.254: USB_HUB:IC1.4 v21.59,22.21 | v52.55,5.05 52.54,5.06 52.54,6.56 52.88,6.9 54.72,6.9 55.45,7.63 MPU:RN2.4 55.61,7.63 v55.12,8.13 | v48.26,12.19 47.55,12.19 47.42,12.32 47.37,12.32 MPU:PROGRAM.5 | MPU:U2.13 52.93,10.92 52.93,11.91 53.82,12.8 v54.61,12.8
  Bottom 0.254: v52.55,5.05 52.35,4.85 52.35,4.1 51.54,3.29 47.6,3.29 46.78,4.11 44.66,4.11 42.51,6.25 42.51,7.87 42.34,8.05 42.34,8.56 40.74,10.16 40.74,11.91 39.78,12.87 39.78,17.12 40.51,17.85 40.51,18.69 39.92,19.28 29.57,19.28 28.95,18.66 28.95,16.2 29.15,16 29.15,15.5 28.79,15.14 28.29,15.14 27.93,15.5 27.93,16 27.94,16.01 27.94,16.51 27.83,16.62 26.62,16.62 26.41,16.41 25.91,16.41 25.55,16.77 25.55,19.66 23.01,22.21 v21.59,22.21 | v48.26,12.19 48.26,11.87 51.29,8.84 55.07,8.84 | GPS:U$1.P$9 93.66,13.04 90.33,16.36 61.62,16.36 61.47,16.51 61.47,17.95 60.87,18.54 60.03,18.54 59.63,18.13 59.39,18.13 59.04,17.78 59.04,15.65 58.93,15.54 58.08,15.54 55.34,12.8 55.22,12.8 | v55.12,8.13 55.07,8.18 55.07,8.84 | v54.61,12.8 55.22,12.8 | 55.22,12.8 55.22,8.99 55.07,8.84
AUD_STATUS  (via drill 0.35)
  Top 0.254: MPU:U2.12 52.02,10.06 49.11,10.06 48.45,9.4 48.45,8.28 47.27,7.1 46.2,7.1 45.68,7.62 45.05,7.62 44.45,8.22 44.45,8.38 v44.2,8.64 | v42.16,12.95 41.49,12.95 R2.2
  Bottom 0.254: v42.16,12.95 42.41,12.71 42.41,12.09 43.24,11.26 43.24,10.12 43.59,9.76 44.09,9.76 44.2,9.65 v44.2,8.64
DM0
  Top 0.254: PBP_FFC:J2.P$29 30.29,20.83 29.89,20.42 21.34,20.42 21.16,20.61 USB_HUB:IC1.2
DM1
  Top 0.254: MPU:U2.3 49.02,18.15 47.69,19.48 47.69,26.73 46.83,27.58 19.71,27.58 19.36,27.23 19.36,26.36 18.64,25.65 18.64,25.24 18.29,24.89 17.78,24.89 17.2,25.47 USB_HUB:IC1.11
DM2  (via drill 0.35)
  Top 0.254: USB_HUB:IC1.15 14,26.34 14.58,25.76 v14.58,25.71 | EXPANSION_FFC:U$1.P$2 103.17,15.81 69.83,15.81 67.62,18.01 67.06,18.01 v66.47,18.6
  Bottom 0.254: v66.47,18.6 66.27,18.8 66.08,18.8 65.49,19.39 65.49,22.86 62.49,25.86 52.82,25.86 52.32,25.35 50.81,25.35 49.74,26.42 14.96,26.42 14.58,26.04 v14.58,25.71
DM3  (via drill 0.35)
  Top 0.254: USB_HUB:IC1.19 10.5,23.81 v10.41,23.89 | v66.5,19.81 66.7,19.61 66.7,19.58 67.06,19.23 67.56,19.23 70.16,16.62 100.95,16.62 101.45,17.12 102.46,17.12 102.49,17.15 EXPANSION_FFC:U$1.P$5
  Bottom 0.254: v10.41,23.89 10.47,23.84 11.35,23.84 13.17,25.65 13.17,25.96 13.52,26.31 13.71,26.31 14.62,27.23 50.08,27.23 51.14,26.16 51.98,26.16 52.49,26.67 62.83,26.67 66.3,23.2 66.3,20.01 v66.5,19.81
DM4  (via drill 0.35)
  Top 0.254: USB_HUB:IC1.23 10.43,20.61 v10.41,20.62
  Bottom 0.254: v10.41,20.62 14.69,20.62 18.29,17.02 18.29,13.7 18.78,13.21 USB_A:USB.D-
DP0
  Top 0.254: USB_HUB:IC1.1 21.08,19.81 21.29,20.02 30.06,20.02 30.79,20.75 PBP_FFC:J2.P$28
DP1
  Top 0.254: MPU:U2.4 49.25,17.35 47.22,19.37 47.22,26.61 46.66,27.18 19.88,27.18 19.76,27.06 19.76,26.2 19.05,25.48 19.05,25.07 18.45,24.48 17.61,24.48 16.4,25.69 USB_HUB:IC1.12
DP2  (via drill 0.35)
  Top 0.254: v13.77,25.71 13.2,26.28 USB_HUB:IC1.16 | EXPANSION_FFC:U$1.P$3 102.87,16.22 69.99,16.22 67.59,18.62 v67.31,18.62
  Bottom 0.254: v13.77,25.71 13.97,25.91 13.97,26.01 14.79,26.82 49.91,26.82 50.97,25.76 52.15,25.76 52.66,26.26 62.66,26.26 65.9,23.03 65.9,19.56 66.25,19.2 66.72,19.2 v67.31,18.62
DP3  (via drill 0.35)
  Top 0.254: USB_HUB:IC1.20 10.49,23.01 v10.41,23.09 | EXPANSION_FFC:U$1.P$6 102.11,17.53 101.28,17.53 100.78,17.03 70.33,17.03 67.73,19.63 67.51,19.63 v67.31,19.83
  Bottom 0.254: v10.41,23.09 10.41,23.03 10.16,23.03 9.81,23.39 9.81,24.14 10.16,24.5 10.66,24.5 10.86,24.31 11.25,24.31 12.76,25.82 12.76,26.13 13.36,26.72 13.54,26.72 14.45,27.63 50.25,27.63 51.31,26.57 51.81,26.57 52.32,27.08 63,27.08 66.71,23.37 66.71,20.46 67.11,20.06 67.11,20.03 v67.31,19.83
DP4  (via drill 0.35)
  Top 0.254: USB_HUB:IC1.24 v10.41,19.81
  Bottom 0.254: v10.41,19.81 10.61,20.01 10.66,20.01 10.87,20.21 14.52,20.21 17.27,17.36 17.27,13.46 17.2,13.37 USB_A:USB.D+
EXP_EN
  Top 0.254: EXPANSION_FFC:U$2.4 62.67,24.38 EXPANSION_FFC:R2.2 60.22,23.55 58.93,23.55 58.53,23.16 MPU:U2.36
EXPANSION_FFC:ISET
  Top 0.254: EXPANSION_FFC:R1.1 62.67,26.42 EXPANSION_FFC:U$2.3
EXPANSION_FFC:VOUT
  Top 0.254: EXPANSION_FFC:U$1.P$15 100.86,22.21 EXPANSION_FFC:U$1.P$16
  Top 0.508: EXPANSION_FFC:U$2.1 66.66,26.55 66.79,26.42 EXPANSION_FFC:C1.1 67.55,27.51 98.73,27.51 100.86,25.38 EXPANSION_FFC:U$1.P$16
G0
  Top 0.254: MPU:U2.31 63.55,18.15 64.65,19.25 64.65,20.54 65.77,21.66 68.07,21.66 71.07,18.66 99.94,18.66 101.09,19.81 EXPANSION_FFC:U$1.P$11
G1
  Top 0.254: MPU:U2.30 63.23,17.35 63.25,17.37 63.34,17.37 65.05,19.08 65.05,20.37 65.94,21.25 67.9,21.25 69.54,19.61 69.54,19.56 70.85,18.25 100.25,18.25 101.4,19.41 101.42,19.41 EXPANSION_FFC:U$1.P$10
G2
  Top 0.254: MPU:U2.29 63.1,16.55 65.46,18.91 65.46,20.2 66.1,20.84 67.73,20.84 69.14,19.44 69.14,19.39 70.68,17.84 100.42,17.84 101.57,19 101.73,19 EXPANSION_FFC:U$1.P$9
G3
  Top 0.254: MPU:U2.28 62.87,15.75 65.86,18.74 65.86,20.03 66.27,20.44 67.56,20.44 67.92,20.08 67.92,20.02 70.5,17.44 100.58,17.44 101.74,18.59 102.06,18.59 EXPANSION_FFC:U$1.P$8
GND  (via drill 0.35)
  Top 0.254: 42.29,22.45 41.79,22.45 PBP_FFC:J2.P$6 41.79,20.57 42.29,20.57 | 42.29,22.45 42.79,22.45 | 42.79,22.45 43.29,22.45 | 43.29,22.45 43.79,22.45 | 43.79,22.45 44.29,22.45 PBP_FFC:J2.P$1 44.29,20.67 44.2,20.57 43.79,20.57 | 42.29,20.57 42.79,20.57 | 42.79,20.57 43.29,20.57 | 43.29,20.57 43.79,20.57 | 42.29,20.57 PBP_FFC:J2.P$5 42.29,22.45 | 42.79,20.57 PBP_FFC:J2.P$4 42.79,22.45 | 43.29,20.57 PBP_FFC:J2.P$3 43.29,22.45 | 43.79,20.57 PBP_FFC:J2.P$2 43.79,22.45 | 39.79,22.35 40.29,22.35 PBP_FFC:J2.P$9 40.29,20.57 39.79,20.57 | 39.79,22.35 39.29,22.35 | 39.29,22.35 38.79,22.35 PBP_FFC:J2.P$12 38.79,20.57 39.29,20.57 | 39.29,22.35 PBP_FFC:J2.P$11 39.29,20.57 | 39.79,22.35 PBP_FFC:J2.P$10 39.79,20.57 | 39.29,20.57 39.79,20.57 | 34.04,17.27 MICROSD:ESD1.P$1 | PBP_FFC:J2.P$19 35.29,20.08 35.73,19.64 35.73,18.33 35.32,17.92 MICROSD:ESD4.P$1 | 31.29,20.82 PBP_FFC:J2.P$27 31.27,21.52 31.27,22.17 31.06,22.38 30.73,22.38
  Top 0.305: USB_HUB:IC1.31 18,17.1 HALL_EFFECT:U$1.3
  Top 0.406: MICROSD:ESD1.P$1 34.8,17.66 MICROSD:ESD4.P$1 | MICROSD:ESD3.P$1 29.46,16.65 MICROSD:ESD2.P$1 | MICROSD:C1.2 54.01,2.47 v54.61,2.47 | PWR_MGMT:U1100.6 PWR_MGMT:U1150.1 88.83,26.71 88.65,26.9 84.07,26.9 | 84.07,26.9 PWR_MGMT:JP-GND.1 | 84.07,26.9 83.44,26.9 v83.31,26.77 | v51.56,27.18 D1.C
  Bottom 0.406: MICROSD:JP1.CD2 49.16,17.12 47.5,17.12 | 40.64,2.54 40.71,2.47 MICROSD:JP1.GND1 53.96,2.47 | MICROSD:JP1.GND3 55.95,2.47 v54.61,2.47 53.96,2.47 | MICROSD:JP1.GND 53.96,2.47 | v83.31,26.77 82.53,27.56 51.94,27.56 v51.56,27.18
  other vias: 29.97,24.13 24.13,17.02 19.81,16.76 16,22.61 3.56,1.78 44.2,25.15 38.35,14.48 36.58,14.48 34.54,14.48 39.62,7.62 31.24,3.05 26.16,6.6 38.1,24.38 18.03,23.37 27.18,19.05 42.16,11.18 41.91,17.02 45.72,18.29 31.5,8.89 8.13,10.16 10.41,7.11 1.78,8.64 9.65,2.54 15.75,14.99 11.68,18.03 49.02,24.89
  pour Top (rank 6): -2,30.02 41.33,30.02 52.07,29.97 52.07,20.32 41.33,9.58 41.33,-1.24 -2,-1.24
  pour Bottom (rank 6): -1,29.02 41.33,29.02 52.07,28.96 52.07,20.32 41.33,9.58 41.33,-1.98 -1,-1.98
GND_ISOLATED  (via drill 0.35)
  Top 0.305: EEPROM:EEPROM.4 EEPROM:EEPROM.3 EEPROM:EEPROM.2 | EEPROM:EEPROM.2 EEPROM:EEPROM.1 | EEPROM:EEPROM.7 47.75,4.95 | 47.75,4.95 EEPROM:EEPROM.2 | EEPROM:C1.2 48.98,8.43 48.98,8.2 47.87,7.09 47.87,5.07 47.75,4.95
  Top 0.406: MPU:C3.2 46.9,16 47.44,16 47.44,16.39 47.65,16.6 50.28,16.6 MPU:U2.5
  Top 0.508: 86.11,24.89 86.11,22.1 PWR_MGMT:R1101.1 90.02,21.14 91.49,21.14 92.45,22.1 PWR_MGMT:C1103.2 | MPU:C4.2 52.93,23.2 MPU:U2.43
  other vias: 52.07,11.94 55,5.08 55.37,3.3 82.04,26.77 103.63,23.11 104.39,19.05 108.97,12.95 108.97,10.67 102.36,10.67 102.62,13.21 95.76,4.32 63.5,19.3 62.48,21.59 59.69,12.7 54.43,11.43 50.55,4.83 46.99,6.35 58.17,4.57 52.32,16.76 60.71,22.86 59.69,2.03 59.69,3.56
  pour Top (rank 5): 52.07,29.97 115,29.97 115,-1.24 41.33,-1.24 41.33,9.58 52.07,20.32
  pour Bottom (rank 5): 52.07,28.96 115,28.96 115,-2 41.33,-2 41.33,9.58 52.07,20.32
GPS:RF_IN  (via drill 0.35)
  Top 0.254: v108.97,11.94 105.97,11.94 GPS:J1.FEED
  Bottom 0.254: GPS:U$1.P$11 v108.97,11.94
GPS_ENABLE  (via drill 0.35)
  Top 0.254: v59.65,17.53 59.84,17.73 59.84,17.78 60.05,17.98 60.05,18.71 61.08,19.75 MPU:U2.33
  Bottom 0.254: GPS:U$1.P$5 95.45,8.64 94.94,9.14 94.94,11.17 90.17,15.95 61.45,15.95 61.06,16.34 61.06,17.78 60.7,18.13 60.2,18.13 59.84,17.78 59.84,17.73 v59.65,17.53
HALL_SENSE  (via drill 0.35)
  Top 0.254: PBP_FFC:J2.P$32 v28.79,23.11 | HALL_EFFECT:U$1.2 19.05,14.68 24.59,14.68 24.74,14.83 26.35,14.83 HALL_EFFECT:R1.1 28.45,15.66 v28.54,15.75
  Bottom 0.254: v28.79,23.11 28.99,22.91 28.99,19.28 28.54,18.83 v28.54,15.75
HP_DET_H  (via drill 0.35)
  Top 0.254: HEADPHONE:ESD1.P$2 40.39,17.49 39.61,18.27 | PBP_FFC:J2.P$13 38.29,19.59 39.61,18.27 | v39.5,18.27 39.61,18.27 | 31.65,12.59 HEADPHONE:C1.1 | v32.37,12.59 31.65,12.59 | HEADPHONE:HEADPHONES.B3 31.65,12.59
  Bottom 0.254: v39.5,18.27 38.25,17.02 38.25,17.01 34.57,13.33 33.12,13.33 v32.37,12.59 31.65,12.59 HEADPHONE:HEADPHONES.B3
HP_GND  (via drill 0.35)
  Top 0.254: PBP_FFC:J2.P$15 37.29,20.38 37.36,20.31 37.36,18.07 38.19,17.23 38.87,17.23 39.03,17.07 39.03,15.22 40.7,13.56 42.41,13.56 42.77,13.21 42.77,12.7 41.94,11.87 41.15,11.87 40.72,11.44 40.72,5.86 40.18,5.32 40.18,1.57 40.04,1.43 HEADPHONE:HEADPHONES.B4
  other vias: 39.2,1.43
HPO_L  (via drill 0.35)
  Top 0.254: PBP_FFC:J2.P$16 36.79,20.3 36.95,20.15 36.95,17.61 v37.04,17.53 38.14,16.43 HEADPHONE:ESD2.P$2
  Bottom 0.254: v37.04,17.53 35.36,15.85 33.28,15.85 29.63,12.2 29.63,6.3 HEADPHONE:HEADPHONES.B2
  other vias: 31.3,4.63
HPO_R  (via drill 0.35)
  Top 0.254: PBP_FFC:J2.P$17 36.29,20.23 36.54,19.98 36.54,17.89 36.43,17.78 36.43,16.57 HEADPHONE:ESD3.P$2 36.66,16.43 37.34,15.75 37.34,13.97 37.78,13.53 40.15,13.53 40.31,13.37 40.31,6.03 39.7,5.41 HEADPHONE:HEADPHONES.B6
  other vias: 39.2,4.63
MIC_IN2P  (via drill 0.35)
  Top 0.254: PBP_FFC:J2.P$18 35.79,20.15 36.14,19.81 36.14,18.06 36.03,17.95 36.03,17.25 35.79,17.02 35.79,16.7 35.56,16.47 34.84,16.47 HEADPHONE:ESD4.P$2 34.8,16.1 34.4,16.1 33.56,15.26 31,15.26 30.83,15.09 30.83,13.86 31,13.7 31.01,13.7 31.24,13.46 31.24,11.97 30.67,11.4 30.67,8.23 HEADPHONE:R1.1 29.55,3.65 31.78,1.43
  Top 0.406: 31.78,1.43 HEADPHONE:HEADPHONES.B1
  other vias: 31.3,1.43
MPU:32U4_OSC
  Top 0.254: MPU:U2.17 56.13,9.14 55.91,8.92 54.38,8.92 54.01,8.54 MPU:U$2.3
MPU:PB1/SCK
  Top 0.254: MPU:U2.9 49.53,13.35 49.3,13.12 49.3,11.98 48.25,10.92 MPU:PROGRAM.3
MPU:PB2/MOSI
  Top 0.254: MPU:U2.10 50.93,12.55 51.36,12.11 51.36,11.38 51.2,11.22 49.69,11.22 48.04,9.57 48.04,8.45 47.1,7.51 46.37,7.51 45.85,8.03 45.22,8.03 44.86,8.38 44.86,8.89 45.43,9.46 45.43,10.25 45.97,10.79 45.97,10.92 MPU:PROGRAM.4
MPU:PB3/MISO
  Top 0.254: MPU:PROGRAM.1 47.37,9.53 47.42,9.53 49.65,11.75 MPU:U2.11
MPU:UCAP
  Top 0.406: MPU:U2.6 MPU:C3.1
MPU_RX  (via drill 0.35)
  Top 0.254: v58.7,8.79 58.53,8.96 MPU:U2.20
  Bottom 0.254: v58.7,8.79 58.55,8.64 57.4,8.64 56.03,10.01 56.03,12.34 58.42,14.73 89.66,14.73 93.73,10.67 93.73,7.71 96.1,5.34 GPS:U$1.P$2
MPU_TX  (via drill 0.35)
  Top 0.254: v59.51,8.79 59.33,8.96 MPU:U2.21
  Bottom 0.254: v59.51,8.79 59.31,8.59 59.31,8.54 58.95,8.18 58.45,8.18 58.4,8.23 57.24,8.23 55.62,9.84 55.62,12.51 58.25,15.14 89.83,15.14 94.13,10.84 94.13,7.87 95.57,6.44 GPS:U$1.P$3
N$1
  Top 0.254: R1.1 48.09,23.62 48.09,26.62 D1.A
N$2
  Top 0.254: R2.1 39.54,12.32 36.13,12.32 D2.A
PULSE  (via drill 0.35)
  Top 0.254: MPU:U2.32 61.87,18.95 61.85,18.92 60.83,18.92 60.45,18.54 v60.45,17.53
  Bottom 0.254: GPS:U$1.P$4 95.05,7.54 94.54,8.04 94.54,11.01 90,15.54 61.28,15.54 60.45,16.37 v60.45,17.53
PWR_MGMT:FS_CS
  Top 0.254: PWR_MGMT:U1100.2 91.95,22.35 91.69,22.1 PWR_MGMT:R1101.2
PWR_MGMT:FS_V_BATT
  Top 0.305: PWR_MGMT:R1102.1 93.98,25.74 93.63,25.4 93.63,25.29 | PWR_MGMT:C1103.1 93.63,23.3 93.63,25.29 | 93.63,25.29 92.47,25.29 91.95,25.81 PWR_MGMT:U1100.5
PWR_MGMT:OC
  Top 0.254: PWR_MGMT:U1100.3 92.9,23.94 92.37,24.47 89.56,24.47 PWR_MGMT:U1150.6
PWR_MGMT:OD
  Top 0.254: PWR_MGMT:U1150.4 86.93,23.55 87.47,23.01 90.27,23.01 PWR_MGMT:U1100.1
SAO1
  Top 0.305: MPU:U2.25 62.74,13.35 63.08,13.69 64.91,13.69 65.58,13.02 65.58,8.67 64.8,7.88 64.8,6.85 66.04,5.61 SAO.5
SAO2
  Top 0.305: SAO.6 66.04,13.21 65.1,14.15 MPU:U2.26
SCL  (via drill 0.35)
  Top 0.254: EEPROM:EEPROM.6 48.9,3.68 49.65,2.92 49.65,2.62 50.47,1.8 56.39,1.8 58.77,4.19 58.77,6.38 58.22,6.93 57.48,6.93 57.3,7.11 MPU:RN2.2 57.3,8.78 56.93,9.14 MPU:U2.18 56.93,11.39 v56.9,11.43 | v58.8,11.43 58.8,18.04 61.04,20.28 63.81,20.28 65.6,22.06 68.23,22.06 71.24,19.06 99.63,19.06 100.79,20.22 EXPANSION_FFC:U$1.P$12 102.64,21.08 103.89,21.08 106.27,18.69 106.27,16.61 104.14,14.48 102.36,14.48 101.09,13.21 101.09,7.11 102.87,5.33 v105.41,5.33
  Bottom 0.254: v56.9,11.43 v58.8,11.43 60.55,11.43 62.69,9.29 62.69,8.18 SAO.4 | v105.41,5.33 v105.41,5.34 GPS:U$1.P$17
SD_CLK  (via drill 0.35)
  Top 0.254: MICROSD:ESD4.P$2 35.05,19.74 34.79,20 PBP_FFC:J2.P$20 34.79,22.14 35.03,22.38 36.15,22.38 v36.53,22.76
  Bottom 0.254: MICROSD:JP1.CLK 52.86,7.08 52.32,7.62 50.78,7.62 47.85,10.55 46.24,10.55 44.03,12.76 44.03,19.3 41.28,22.05 37.52,22.05 36.81,22.76 v36.53,22.76
SD_CMD  (via drill 0.35)
  Top 0.254: MICROSD:ESD5.P$2 33.02,19.16 33.79,19.93 PBP_FFC:J2.P$22 33.79,22.5 34.37,23.07 v34.37,23.24
  Bottom 0.254: MICROSD:JP1.CMD 50.66,7.16 47.69,10.14 46.08,10.14 43.62,12.59 43.62,19.13 41.12,21.64 37.34,21.64 37.08,21.9 37.08,21.91 36.85,22.15 36.28,22.15 35.47,22.96 34.65,22.96 v34.37,23.24
SD_D0  (via drill 0.35)
  Top 0.254: MICROSD:ESD3.P$2 29.16,18.2 30.12,19.16 30.47,19.16 31.79,20.48 PBP_FFC:J2.P$26 31.77,21.52 31.77,22.24 31.19,22.82 v31.19,23.37
  Bottom 0.254: v31.19,23.37 31.54,23.72 33.99,23.72 34.12,23.85 34.62,23.85 35.1,23.36 36.78,23.36 37.69,22.45 41.45,22.45 44.44,19.47 44.44,12.93 46.41,10.95 48.02,10.95 50.95,8.03 53.79,8.03 55.06,6.75 MICROSD:JP1.DAT0
SD_D1  (via drill 0.35)
  Top 0.254: MICROSD:ESD2.P$2 29.97,18.26 30.47,18.76 30.64,18.76 32.29,20.41 PBP_FFC:J2.P$25 32.27,21.52 32.27,22.32 31.98,22.61 v31.98,23.11
  Bottom 0.254: MICROSD:JP1.DAT1 56.16,7.34 55.98,7.52 54.87,7.52 53.95,8.43 51.12,8.43 48.19,11.36 46.58,11.36 44.84,13.1 44.84,19.64 41.62,22.86 37.86,22.86 36.95,23.77 35.37,23.77 34.89,24.25 33.95,24.25 33.82,24.13 31.09,24.13 30.58,23.62 30.58,23.12 30.94,22.76 31.44,22.76 31.8,23.11 v31.98,23.11
SD_D2  (via drill 0.35)
  Top 0.254: v32.77,22.86 PBP_FFC:J2.P$24 32.79,20.34 30.99,18.53 MICROSD:ESD7.P$2
  Bottom 0.254: MICROSD:JP1.DAT2 48.46,8.21 47.35,9.33 45.74,9.33 42.81,12.26 42.81,18.8 40.78,20.83 36.72,20.83 36.21,21.34 35.94,21.34 35.14,22.14 34.31,22.14 34.23,22.23 33.87,22.23 33.59,22.51 33.3,22.51 32.95,22.86 v32.77,22.86
SD_D3  (via drill 0.35)
  Top 0.254: MICROSD:ESD6.P$2 32,18.97 33.29,20.26 PBP_FFC:J2.P$23 33.29,22.53 33.39,22.62 33.39,22.66 33.55,22.83 v33.55,23.11
  Bottom 0.254: MICROSD:JP1.CD/DAT3 49.56,7.69 47.52,9.73 45.91,9.73 43.22,12.43 43.22,18.96 40.95,21.23 37.08,21.23 36.58,21.74 36.11,21.74 35.3,22.55 34.48,22.55 34.4,22.63 34.03,22.63 v33.55,23.11
SD_DET_L  (via drill 0.35)
  Top 0.254: MICROSD:ESD1.P$2 34.04,19.34 34.29,19.6 PBP_FFC:J2.P$21 34.29,22.22 34.86,22.78 35.7,22.78 36.28,23.36 38.01,23.36 v38.11,23.47
  Bottom 0.254: MICROSD:JP1.CD1 55.12,16.62 54.14,17.6 47.46,17.6 41.79,23.27 38.31,23.27 v38.11,23.47
SDA  (via drill 0.35)
  Top 0.254: EEPROM:EEPROM.5 49.28,2.41 50.3,1.4 56.56,1.4 58.57,3.41 | v105.41,6.14 105.21,5.94 105.16,5.94 104.96,5.74 103.04,5.74 101.5,7.28 101.5,13.04 102.53,14.07 104.31,14.07 106.68,16.44 106.68,18.86 104.05,21.49 102.34,21.49 EXPANSION_FFC:U$1.P$13 100.48,20.62 100.32,20.47 100.32,20.33 99.46,19.47 71.41,19.47 68.4,22.47 65.43,22.47 63.64,20.68 60.87,20.68 58.4,18.21 58.4,12.42 57.73,11.76 MPU:U2.19 57.73,8.93 58.1,8.57 MPU:RN2.1 59.18,6.55 59.18,4.02 58.57,3.41 | 58.57,3.41 59.03,2.95 61.62,2.95 SAO.3
  Bottom 0.254: GPS:U$1.P$16 105.7,6.44 v105.41,6.14
STATUS
  Top 0.254: MPU:U2.1 50.32,19.76 48.4,19.76 48.09,20.07 48.09,21.08 R1.2
USB_A:ISET
  Top 0.254: USB_A:U$1.3 20.19,10.53 20.67,10.05 22.59,10.05 USB_A:R1.1
USB_A:VOUT  (via drill 0.35)
  Top 0.406: USB_A:C1.1 16.56,10.53 USB_A:U$1.1 17.85,9.56 v17.78,9.5
  Bottom 0.406: v17.78,9.5 17.78,9.91 18.54,10.67 20.83,10.67 21.34,11.18 21.34,12.9 USB_A:USB.VCC
USB_EN  (via drill 0.35)
  Top 0.254: USB_A:R2.2 22.16,11.66 22.16,13.31 | USB_A:U$1.4 20.23,13.31 22.16,13.31 | MPU:U2.8 49.61,14.15 49.24,14.51 44.84,14.51 44.27,13.95 44.27,10.79 44.45,10.62 44.45,10.12 44.09,9.76 43.03,9.76 42.57,9.29 42.57,8.23 41.96,7.62 v41.91,7.62 | v26.16,7.62 26.16,12.45 25.3,13.31 22.16,13.31
  Bottom 0.254: v26.16,7.62 27.97,7.62 29.23,8.88 29.23,12.37 33.11,16.25 35.19,16.25 36.43,17.49 36.43,17.78 37.53,18.88 39.75,18.88 40.11,18.52 40.11,18.02 39.37,17.28 39.37,12.7 40.33,11.74 40.33,9.99 41.91,8.41 v41.91,7.62
USB_HUB:N$1
  Top 0.254: USB_HUB:IC1.30 17.2,18.98 17.27,19.05 19.17,19.05 19.51,18.72 20.27,18.72 20.39,18.59 20.39,17.73 20.56,17.57 21.5,17.57 USB_HUB:U$1.3
V_BATT
  Top 0.508: PWR_MGMT:R1102.2 96.69,24.04 PWR_MGMT:BATT.1